# Altium PCB AC_board.PcbDoc (part 2 of 4)
Units mil, origin at the board's own origin, x right, y up, seen from the top; angles counter-clockwise.
Board outline 6299.21 x 4130.86 mil, 4 copper layers (Top Layer, Layer 1, Layer 2, Bottom Layer), stack 31.891 mil thick; 48 components, 40 nets, 187 pads, 6431 vias.
Unrouted connection lines stored in the file: 10.
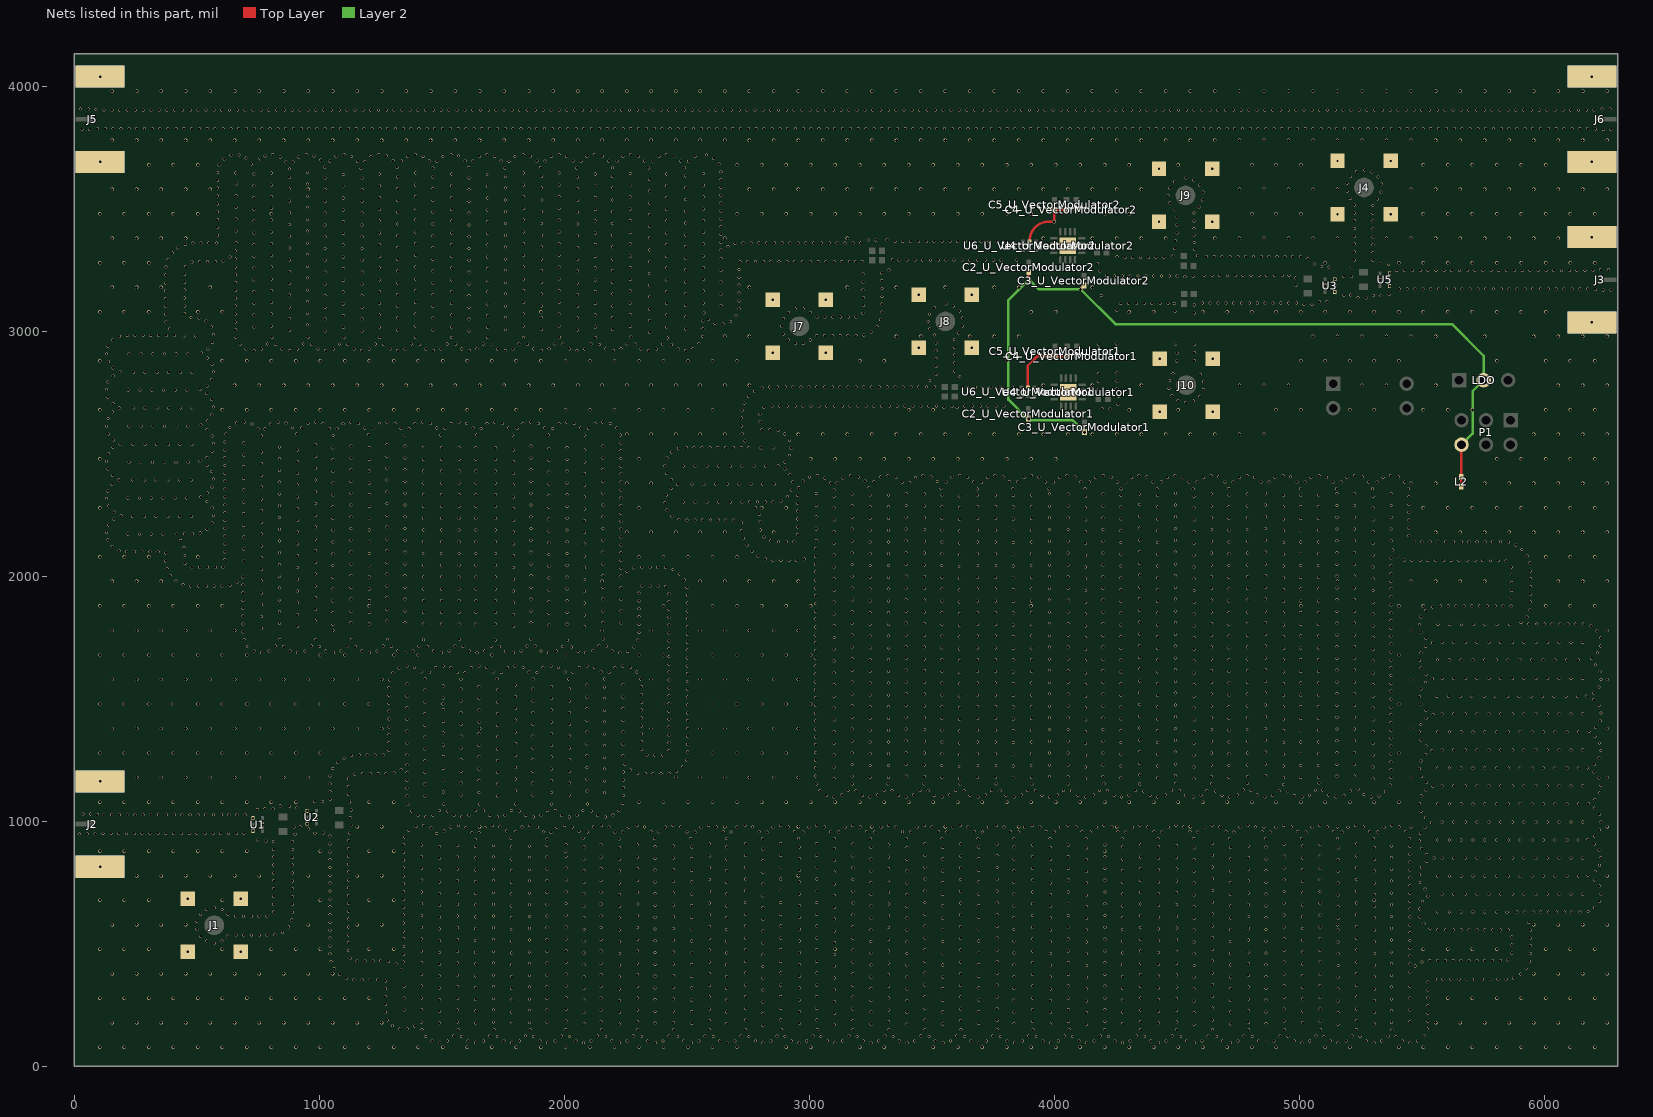
[diagram p4: the nets of this part, all layers, seen from the top]

## Via types
v1: diameter 12/12/12/12 (per signal layer), hole 10, Top Layer to Bottom Layer, 5510 vias
v2: diameter 14/14/14/14 (per signal layer), hole 12, Top Layer to Bottom Layer, 919 vias
v3: diameter 15/15/15/15 (per signal layer), hole 12, Top Layer to Bottom Layer, 2 vias

## Nets (pads, with @x,y where several pads share a name; then routed paths per layer and width w, separated by ;. In a path a pad name is that pad's centre, name@x,y a point inside that pad or via, vN(x,y) a via of type N, cw(c..) or ccw(c..) an arc to the next point about the centre after c; other vN are vias at no path point) (continued)
AGND: (continued)
  other v1: 1492.18,98.86 1638.79,98.86 1785.4,98.86 1932.01,98.86 2078.62,98.86 2225.23,98.86 2371.84,98.86 2518.45,98.86 2665.06,98.86 2811.67,98.86 2958.28,98.86 3104.89,98.86 3251.5,98.86 3398.11,98.86 3544.71,98.86 3691.33,98.86 3837.93,98.86 3984.56,98.86 4131.14,98.86 4277.79,98.86 4424.35,98.86 4571.03,98.86 4717.53,98.86 4864.3,98.86 5010.68,98.86 5157.63,98.86 5303.75,98.86 5451.07,98.86 1460.86,105.44 1607.47,105.44 1754.08,105.44 1900.69,105.44 2047.3,105.44 2193.91,105.44 2340.52,105.44 2487.13,105.44 2633.74,105.44 2780.35,105.44 2926.96,105.44 3073.57,105.44 3220.18,105.44 3366.79,105.44 3513.4,105.44 3660.01,105.43 3806.61,105.44 3953.24,105.43 4099.83,105.44 4246.47,105.43 4393.03,105.45 4539.71,105.42 4686.22,105.46 4832.98,105.4 4979.37,105.49 5126.3,105.36 5419.72,105.28 1523.35,106.09 1669.96,106.09 1816.57,106.09 1963.18,106.09 2109.79,106.09 2256.4,106.09 2403.01,106.09 2549.62,106.09 2696.23,106.09 2842.84,106.09 2989.45,106.09 3136.06,106.09 3282.67,106.09 3429.28,106.09 3575.89,106.09 3722.5,106.09 3869.1,106.09 4015.73,106.1 4162.32,106.09 4308.96,106.1 4455.52,106.08 4602.2,106.11 4748.71,106.07 4895.47,106.13 5041.86,106.04 5188.78,106.17 5272.45,105.55 5334.94,105.98 5482.2,106.25 1435.05,124.36 1581.66,124.36 1728.27,124.36 1874.88,124.36 2021.49,124.36 2168.1,124.36 2314.71,124.36 2461.32,124.36 2607.93,124.36 2754.55,124.36 2901.15,124.36 3047.77,124.36 3194.37,124.36 3340.99,124.36 3487.59,124.36 3634.21,124.36 3780.81,124.37 3927.43,124.35 4074.03,124.37 4220.66,124.34 4367.23,124.38 4513.89,124.32 4660.43,124.41 4807.14,124.28 4953.61,124.47 5100.43,124.2 5393.78,124.02 5246.74,124.59 5360.31,125.49 1548.62,125.72 1695.23,125.72 1841.84,125.72 1988.45,125.72 2135.06,125.72 2281.67,125.72 2428.28,125.72 2574.89,125.72 2721.5,125.72 2868.11,125.72 3014.72,125.72 3161.33,125.72 3307.94,125.72 3454.55,125.72 3601.16,125.72 3747.77,125.73 3894.38,125.72 4041,125.73 4187.59,125.71 4334.22,125.74 4480.8,125.7 4627.46,125.76 4774,125.67 4920.71,125.8 5067.18,125.61 5213.99,125.88 5507.34,126.05 1419.66,152.41 1566.27,152.41 1712.88,152.41 1859.49,152.41 2006.1,152.41 2152.71,152.41 2299.32,152.41 2445.93,152.41 2592.54,152.41 2739.15,152.41 2885.76,152.41 3032.37,152.41 3178.98,152.42 3325.59,152.41 3472.2,152.42 3618.81,152.41 3765.42,152.42 3912.03,152.4 4058.64,152.43 4205.26,152.39 4351.85,152.45 4498.48,152.37 4645.06,152.48 4791.72,152.32 5084.97,152.21 5378.24,151.99 4938.26,152.55 5231.44,152.7 1328.26,154.4 1360.26,154.16 5522,154.5 1299.35,168.12 1389.33,167.55 2811.31,170 3102.31,171 4130.31,174 4569.31,174 5156.31,174 2225.31,175 3399.31,175 3983.31,175 5305.31,175 3252,176 3544.31,176 4719.31,176 1785.31,177 2080.31,177 2662.31,177 3835.31,177 4278.31,177 4863.31,177 2520.31,178 2959.31,178 3691.31,178 1490.31,179 2370.31,179 4424.31,179 1638.31,180 2445.31,181 5012.31,181 1858.31,182 4791.31,182 5375.31,182 4497.31,183 1416.61,184.27 1564.31,184 1711.31,184 1930.31,184 2149.31,185 2298.31,185 3322.31,185 4351.31,185 5451.07,184.73 3911.31,186 4056.31,186 4206.31,186 5524.49,186.4 2006.31,187 4936.31,188 5084.31,188 2592.31,189 3178.31,189 3617.31,189 5233.31,189 3765.31,190 2740.31,191 2883.31,191 3030.31,191 3472.31,191 1278.59,192.47 4644.31,192 2811.31,218 5524.49,218.4 3102.31,219 4130.31,222 4569.31,222 5156.31,222 1270.03,223.3 2225.31,223 3399.31,223 3983.31,223 5305.31,223 3252,224 3544.31,224 4719.31,224 1785.31,225 2080.31,225 2662.31,225 3835.31,225 4278.31,225 4863.31,225 2520.31,226 2959.31,226 3691.31,226 1490.31,227 2370.31,227 4424.31,227 1638.31,228 2445.31,229 5012.31,229 1858.31,230 4791.31,230 5375.31,230 4497.31,231 1564.31,232 1711.31,232 1930.31,232 1345.31,233 2149.31,233 2298.31,233 3322.31,233 4351.31,233 5451.07,232.73 1417.31,234 3911.31,234 4056.31,234 4206.31,234 2006.31,235 4936.31,236 5084.31,236 2592.31,237 3178.31,237 3617.31,237 5233.31,237 3765.31,238 2740.31,239 2883.31,239 3030.31,239 3472.31,239 4644.31,240 5524.49,250.4 1270,255.3 2811.31,266 3102.31,267 4130.31,270 4569.31,270 5156.31,270 2225.31,271 3399.31,271 3983.31,271 5305.31,271 3252,272 3544.31,272 4719.31,272 1785.31,273 2080.31,273 2662.31,273 3835.31,273 4278.31,273 4863.31,273 2520.31,274 2959.31,274 3691.31,274 1490.31,275 2370.31,275 4424.31,275 1638.31,276 2445.31,277 5012.31,277 1858.31,278 4791.31,278 5375.31,278 4497.31,279 1564.31,280 1711.31,280 1930.31,280 1345.31,281 2149.31,281 2298.31,281 3322.31,281 4351.31,281 5451.07,280.73 1417.31,282 3911.31,282 4056.31,282 4206.31,282 5524.49,282.4 2006.31,283 4936.31,284 5084.31,284 2592.31,285 3178.31,285 3617.31,285 5233.31,285 3765.31,286 1270,287.3 2740.31,287 2883.31,287 3030.31,287 3472.31,287 4644.31,288 2811.31,314 5524.49,314.4 3102.31,315 4130.31,318 4569.31,318 5156.31,318 1270,319.3 2225.31,319 3399.31,319 3983.31,319 5305.31,319 3252,320 3544.31,320 4719.31,320 1785.31,321 2080.31,321 2662.31,321 3835.31,321 4278.31,321 4863.31,321 2520.31,322 2959.31,322 3691.31,322 1490.31,323 2370.31,323 4424.31,323 1638.31,324 2445.31,325 5012.31,325 1858.31,326 4791.31,326 5375.31,326 4497.31,327 1564.31,328 1711.31,328 1930.31,328 1345.31,329 2149.31,329 2298.31,329 3322.31,329 4351.31,329 5451.07,328.73 1417.31,330 3911.31,330 4056.31,330 4206.31,330 2006.31,331 4936.31,332 5084.31,332 2592.31,333 3178.31,333 3617.31,333 5233.31,333 3765.31,334 2740.31,335 2883.31,335 3030.31,335 3472.31,335 4644.31,336 5524.49,346.4 1270,351.3 1142.34,355.95 1174.34,355.95 1206.34,355.95 1238.34,355.95 5554.33,357.95 5586.33,357.95 5618.33,357.95 5650.33,357.95 5682.33,357.95 5714.33,357.95 5746.33,357.95 5778.33,357.95 5810.33,357.95 5842.33,357.9 1110.8,361.36 2811.31,362 3102.31,363 5873.76,363.94 4130.31,366 4569.31,366 5156.31,366 2225.31,367 3399.31,367 3983.31,367 5305.31,367 3252,368 3544.31,368 4719.31,368 1785.31,369 2080.31,369 2662.31,369 3835.31,369 4278.31,369 4863.31,369 2520.31,370 2959.31,370 3691.31,370 1490.31,371 2370.31,371 4424.31,371 1638.31,372 2445.31,373 5012.31,373 1858.31,374 4791.31,374 5375.31,374 4497.31,375 1564.31,376 1711.31,376 1930.31,376 1083.17,377.49 2149.31,377 2298.31,377 3322.31,377 4351.31,377 1417.31,378 3911.31,378 4056.31,378 4206.31,378 2006.31,379 5901.82,379.31 4936.31,380 5084.31,380 2592.31,381 3178.31,381 3617.31,381 5233.31,381 3765.31,382 2740.31,383 2883.31,383 3030.31,383 3472.31,383 4644.31,384 5451.18,388 1334.95,396.62 1061.52,401.06 5923.93,402.45 2811.31,410 3102.31,411 5472.23,412.1 4130.31,414 4569.31,414 5156.31,414 2225.31,415 3399.31,415 3983.31,415 5305.31,415 3252,416 3544.31,416 4719.31,416 1785.31,417 2080.31,417 2662.31,417 3835.31,417 4278.31,417 4863.31,417 2520.31,418 2959.31,418 3691.31,418 1490.31,419 2370.31,419 4424.31,419 1312.72,419.64 1638.31,420 5451.18,420 2445.31,421 5012.31,421 1858.31,422 4791.31,422 5375.31,422 4497.31,423 1564.31,424 1711.31,424 1930.31,424 2149.31,425 2298.31,425 3322.31,425 4351.31,425 1417.31,426 3911.31,426 4056.31,426 4206.31,426 2006.31,427 1343.31,427.52 4936.31,428 5084.31,428 5499.77,428.41 2592.31,429 3178.31,429 3617.31,429 5233.31,429 1048.26,430.19 3765.31,430 1282.83,431.06 2740.31,431 2883.31,431 3030.31,431 3472.31,431 5937.62,431.37 1154.84,432.05 1186.84,432.05 1218.84,432.05 1250.84,432.05 4644.31,432 5531.27,434.05 5563.27,434.05 5595.27,434.05 5627.27,434.05 5659.27,434.05 5691.27,434.05 5723.27,434.05 5755.27,434.05 5787.27,434.05 5819.27,434.05 5851.12,437.18 1124.98,443.55 5451.18,452 2811.31,458 3102.31,459 1343.31,459.52 1044.24,461.93 4130.31,462 4569.31,462 5156.31,462 2225.31,463 3399.31,463 3983.31,463 5305.31,463 5942.05,463.06 3252,464 3544.31,464 4719.31,464 1785.31,465 2080.31,465 2662.31,465 3835.31,465 4278.31,465 4863.31,465 2520.31,466 2959.31,466 3691.31,466 5865.95,465.53 1490.31,467 2370.31,467 4424.31,467 1638.31,468 2445.31,469 5012.31,469 463.73,469.73 680.27,469.73 1858.31,470 4791.31,470 5375.31,470 4497.31,471 1564.31,472 1711.31,472 1930.31,472 2149.31,473 2298.31,473 3322.31,473 4351.31,473 1417.31,474 3911.31,474 4056.31,474 4206.31,474 1120.34,475.21 2006.31,475 4936.31,476 5084.31,476 2592.31,477 3178.31,477 3617.31,477 5233.31,477 3765.31,478 2740.31,479 2883.31,479 3030.31,479 3472.31,479 4644.31,480 5451.18,484 1343.31,491.52 1044.24,493.93 5942.05,495.06 5865.95,497.53 572.48,506.3 2811.31,506 1120.34,507.21 3102.31,507 4130.31,510 4569.31,510 5156.31,510 2225.31,511 3399.31,511 3983.31,511 5305.31,511 3252,512 3544.31,512 4719.31,512 541.24,513.22 1785.31,513 2080.31,513 2662.31,513 3835.31,513 4278.31,513 4863.31,513 603.64,513.58 2520.31,514 2959.31,514 3691.31,514 1490.31,515 2370.31,515 4424.31,515 1638.31,516 5451.18,516 2445.31,517 5012.31,517 1858.31,518 4791.31,518 5375.31,518 4497.31,519 1564.31,520 1711.31,520 1930.31,520 2149.31,521 2298.31,521 3322.31,521 4351.31,521 1417.31,522 3911.31,522 4056.31,522 4206.31,522 2006.31,523 1343.31,523.52 4936.31,524 5084.31,524 2592.31,525 3178.31,525 3617.31,525 5233.31,525 1044.24,525.93 3765.31,526 2740.31,527 2883.31,527 3030.31,527 3472.31,527 5942.05,527.06 4644.31,528 5865.95,529.53 516.17,533.11 628.4,533.85 659.99,538.95 691.99,538.95 723.99,538.95 755.99,538.95 787.99,538.95 1120.34,539.21 819.99,539.58 5451.18,548 850.45,549.39 2811.31,554 3102.31,555 1343.31,555.52 1044.24,557.93 4130.31,558 4569.31,558 5156.31,558 5563.84,558.02 5595.84,558.26 5627.84,558.26 5659.84,558.26 5691.84,558.26 5723.84,558.26 5755.84,558.26 5787.84,558.26 5819.84,558.26 5851.84,558.26 2225.31,559 3399.31,559 3983.31,559 5305.31,559 5942.22,559.06 3252,560 3544.31,560 4719.31,560 1785.31,561 2080.31,561 2662.31,561 3835.31,561 4278.31,561 4863.31,561 502.1,561.84 2520.31,562 2959.31,562 3691.31,562 1490.31,563 2370.31,563 4424.31,563 1638.31,564 2445.31,565 5012.31,565 5532.65,565.18 1858.31,566 4791.31,566 5375.31,566 4497.31,567 1564.31,568 1711.31,568 1930.31,568 2149.31,569 2298.31,569 3322.31,569 4351.31,569 1417.31,570 3911.31,570 4056.31,570 4206.31,570 874.38,570.63 1120.34,571.21 2006.31,571 4936.31,572 5084.31,572 2592.31,573 3178.31,573 3617.31,573 5233.31,573 3765.31,574 2740.31,575 2883.31,575 3030.31,575 3472.31,575 4644.31,576 5451.18,580 5507.1,584.45 1343.31,587.52 1044.24,589.93 5935.36,590.32 502.01,593.84 888.28,599.46 2811.31,602 1120.34,603.21 3102.31,603 4130.31,606 4569.31,606 5156.31,606 2225.31,607 3399.31,607 3983.31,607 5305.31,607 3252,608 3544.31,608 4719.31,608 1785.31,609 2080.31,609 2662.31,609 3835.31,609 4278.31,609 4863.31,609 2520.31,610 2959.31,610 3691.31,610 1490.31,611 2370.31,611 4424.31,611 1638.31,612 5451.18,612 2445.31,613 5012.31,613 5492,612.66 1858.31,614 4791.31,614 5375.31,614 659.35,615.05 691.35,615.05 723.35,615.05 755.35,615.05 787.35,615.05 4497.31,615 1564.31,616 1711.31,616 1930.31,616 2149.31,617 2298.31,617 3322.31,617 4351.31,617 1417.31,618 3911.31,618 4056.31,618 4206.31,618 2006.31,619 1343.31,619.52 4936.31,620 5084.31,620 2592.31,621 3178.31,621 3617.31,621 5233.31,621 628.21,622.4 1044.24,621.93 3765.31,622 515.97,622.64 2740.31,623 2883.31,623 3030.31,623 3472.31,623 4644.31,624 890.56,631.38 5846.62,631.26 814.46,632.06 5888.35,631.56 5920.35,631.56 5952.35,631.56 5984.35,631.56 6016.35,631.56 6048.35,631.56 6080.35,631.56 6112.35,631.56 6144.35,631.56 5563.88,632.96 5611.88,632.96 5659.88,632.96 5707.88,632.96 5755.88,632.96 5803.88,632.96 6176.22,634.47 1120.34,635.21 540.94,642.66 603.34,642.54 5451.18,644 5490.19,644.61 572.15,649.7 2811.31,650 6204.37,649.68 3102.31,651 1343.31,651.52 1044.24,653.93 4130.31,654 4569.31,654 5156.31,654 2225.31,655 3399.31,655 3983.31,655 5305.31,655 3252,656 3544.31,656 4719.31,656 1785.31,657 2080.31,657 2662.31,657 3835.31,657 4278.31,657 4863.31,657 2520.31,658 2959.31,658 3691.31,658 1490.31,659 2370.31,659 4424.31,659 1638.31,660 2445.31,661 5012.31,661 1858.31,662 4791.31,662 5375.31,662 890.56,663.38 4497.31,663 814.46,664.06 1564.31,664 1711.31,664 1930.31,664 2149.31,665 2298.31,665 3322.31,665 4351.31,665 1417.31,666 3911.31,666 4056.31,666 4206.31,666 1120.34,667.21 2006.31,667 4936.31,668 5084.31,668 2592.31,669 3178.31,669 3617.31,669 5233.31,669 3765.31,670 2740.31,671 2883.31,671 3030.31,671 3472.31,671 4644.31,672 5501.72,674.46 6223.52,675.32 5451.18,676 1343.31,683.52 463.73,686.27 680.27,686.27 1044.24,685.93 890.56,695.38 814.46,696.06 5524.8,696.63 2811.31,698 1120.34,699.21 3102.31,699 4130.31,702 4569.31,702 5156.31,702 2225.31,703 3399.31,703 3983.31,703 5305.31,703 3252,704 3544.31,704 4719.31,704 1785.31,705 2080.31,705 2662.31,705 3835.31,705 4278.31,705 4863.31,705 2520.31,706 2959.31,706 3691.31,706 5580.62,706.26 5628.62,706.26 5676.62,706.26 5724.62,706.26 5772.62,706.26 5820.62,706.26 5868.62,706.26 5916.62,706.26 5964.62,706.26 6011.62,706.26 6059.62,706.26 6107.62,706.26 6155.62,706.26 1490.31,707 2370.31,707 4424.31,707 6230.3,706.59 1638.31,708 5451.18,708 2445.31,709 5012.31,709 1858.31,710 4791.31,710 5375.31,710 4497.31,711 1564.31,712 1711.31,712 1930.31,712 2149.31,713 2298.31,713 3322.31,713 4351.31,713 1417.31,714 3911.31,714 4056.31,714 4206.31,714 2006.31,715 1343.31,715.52 4936.31,716 5084.31,716 2592.31,717 3178.31,717 3617.31,717 5233.31,717 1044.24,717.93 3765.31,718 2740.31,719 2883.31,719 3030.31,719 3472.31,719 4644.31,720 5511.91,725.92 890.56,727.38 814.46,728.06 1120.34,731.21 6223.27,737.81 5451.18,740 2811.31,746 3102.31,747 1343.31,747.52 1044.24,749.93 4130.31,750 4569.31,750 5156.31,750 2225.31,751 3399.31,751 3983.31,751 5305.31,751 3252,752 3544.31,752 4719.31,752 1785.31,753 2080.31,753 2662.31,753 3835.31,753 4278.31,753 4863.31,753 5494.31,752.64 2520.31,754 2959.31,754 3691.31,754 1490.31,755 2370.31,755 4424.31,755 1638.31,756 2445.31,757 5012.31,757 1858.31,758 4791.31,758 5375.31,758 890.56,759.38 4497.31,759 814.46,760.06 1564.31,760 1711.31,760 1930.31,760 2149.31,761 2298.31,761 3322.31,761 4351.31,761 1417.31,762 3911.31,762 4056.31,762 4206.31,762 1120.34,763.21 2006.31,763 6203.85,763.25 4936.31,764 5084.31,764 2592.31,765 3178.31,765 3617.31,765 5233.31,765 3765.31,766 2740.31,767 2883.31,767 3030.31,767 3472.31,767 4644.31,768 5451.18,772 1343.31,779.52 5563.88,779.57 5611.88,779.57 5659.88,779.57 5707.88,779.57 5755.88,779.57 5803.88,779.57 5851.88,779.57 5899.88,779.57 5947.88,779.57 5994.88,779.57 6042.88,779.57 6090.88,779.57 6138.88,779.57 6177.52,781.43 1044.24,781.93 5489.28,784.24 890.56,791.38 814.46,792.06 2811.31,794 1120.34,795.21 3102.31,795 6205.42,797.09 4130.31,798 4569.31,798 5156.31,798 2225.31,799 3399.31,799 3983.31,799 5305.31,799 3252,800 3544.31,800 4719.31,800 1785.31,801 2080.31,801 2662.31,801 3835.31,801 4278.31,801 4863.31,801 2520.31,802 2959.31,802 3691.31,802 1490.31,803 2370.31,803 4424.31,803 1638.31,804 5451.18,804 2445.31,805 5012.31,805 1858.31,806 4791.31,806 5375.31,806 4497.31,807 1564.31,808 1711.31,808 1930.31,808 2149.31,809 2298.31,809 3322.31,809 4351.31,809 1417.31,810 3911.31,810 4056.31,810 4206.31,810 2006.31,811 1343.31,811.52 4936.31,812 5084.31,812 2592.31,813 3178.31,813 3617.31,813 5233.31,813 1044.24,813.93 3765.31,814 2740.31,815 2883.31,815 3030.31,815 3472.31,815 5498.1,815 4644.31,816 106,817 890.56,823.38 6224.02,823.14 814.46,824.06 1120.34,827.21 5451.18,836 5519.07,839.18 2811.31,842 3102.31,843 1343.31,843.52 1044.24,845.93 4130.31,846 4569.31,846 5156.31,846 2225.31,847 3399.31,847 3983.31,847 5305.31,847 3252,848 3544.31,848 4719.31,848 1785.31,849 2080.31,849 2662.31,849 3835.31,849 4278.31,849 4863.31,849 2520.31,850 2959.31,850 3691.31,850 1490.31,851 2370.31,851 4424.31,851 1638.31,852 2445.31,853 5012.31,853 5548.09,852.65 5580.62,852.87 5628.62,852.87 5676.62,852.87 5724.62,852.87 5772.62,852.87 5820.62,852.87 5868.62,852.87 5916.62,852.87 5964.62,852.87 6011.62,852.87 6059.62,852.87 6107.62,852.87 6155.62,852.87 1858.31,854 4791.31,854 5375.31,854 890.56,855.38 4497.31,855 6230.3,854.52 814.46,856.06 1564.31,856 1711.31,856 1930.31,856 2149.31,857 2298.31,857 3322.31,857 4351.31,857 1417.31,858 3911.31,858 4056.31,858 4206.31,858 1120.34,859.21 2006.31,859 4936.31,860 5084.31,860 2592.31,861 3178.31,861 3617.31,861 5233.31,861 3765.31,862 2740.31,863 2883.31,863 3030.31,863 3472.31,863 4644.31,864 5519.22,866.45 5451.18,868 1343.31,875.52 1044.24,877.93 6222.77,885.62 890.56,887.38 814.46,888.06 2811.31,890 1120.34,891.21 3102.31,891 5498.2,890.58 4130.31,894 4569.31,894 5156.31,894 2225.31,895 3399.31,895 3983.31,895 5305.31,895 3252,896 3544.31,896 4719.31,896 1785.31,897 2080.31,897 2662.31,897 3835.31,897 4278.31,897 4863.31,897 2520.31,898 2959.31,898 3691.31,898 1490.31,899 2370.31,899 4424.31,899 1638.31,900 5451.18,900 2445.31,901 5012.31,901 1858.31,902 4791.31,902 5375.31,902 4497.31,903 1564.31,904 1711.31,904 1930.31,904 2149.31,905 2298.31,905 3322.31,905 4351.31,905 1417.31,906 3911.31,906 4056.31,906 4206.31,906 2006.31,907 1343.31,907.52 4936.31,908 5084.31,908 2592.31,909 3178.31,909 3617.31,909 5233.31,909 1044.24,909.93 3765.31,910 2740.31,911 2883.31,911 3030.31,911 3472.31,911 6202.83,910.64 4644.31,912 890.56,919.38 814.46,920.06 5489.3,921.31 782.55,922.42 1120.34,923.21 750.78,926.25 5563.88,926.18 5611.88,926.18 5659.88,926.18 5707.88,926.18 5755.88,926.18 5803.88,926.18 5851.88,926.18 5899.88,926.18 5947.88,926.18 5994.88,926.18 6042.88,926.18 6090.88,926.18 6138.88,926.18 1637.51,927.25 6175.65,927.54 1930.02,929.88 2222.97,930.91 2516.05,931.4 2662.46,932.18 2809.21,931.64 2955.72,932.01 3102.4,931.75 3248.96,931.93 3395.61,931.81 3542.19,931.89 3688.82,931.83 3835.42,931.88 3982.04,931.85 4128.64,931.87 4275.25,931.85 4421.86,931.86 4568.47,931.86 4715.08,931.86 4861.69,931.86 5008.3,931.86 5154.91,931.86 5301.52,931.86 5448.13,931.86 2075.72,933.28 2369.14,932.53 1781.84,935.13 1349,939 1044.24,941.93 6203.91,942.54 901.5,949.45 22.17,949.73 54.17,949.73 86.16,950.41 118.06,952.95 150.06,952.95 182.06,952.95 214.06,952.95 246.06,952.95 278.06,952.95 310.06,952.95 342.06,952.95 374.06,952.95 406.06,952.95 438.06,952.95 470.06,952.95 502.06,952.95 534.06,952.95 566.06,952.95 598.06,952.95 630.06,952.95 662.06,952.95 694.06,952.95 1479.93,952.53 5494.24,952.93 982.99,953.72 1014.97,954.87 1124.41,954.95 1623.77,956.15 1651.85,955.85 1946.29,957.43 1915.33,958.3 2239.96,958.03 2533.39,958.3 2826.71,958.43 3119.98,958.49 2094.33,959.31 2207.91,959.15 2387.25,958.91 2680.33,958.72 2973.48,958.63 3266.66,958.59 3413.22,958.52 3559.87,958.57 3706.45,958.54 3853.08,958.56 3999.68,958.54 4146.3,958.55 4292.9,958.55 4439.52,958.55 4586.12,958.55 4732.73,958.55 4879.34,958.55 5025.95,958.55 5172.56,958.55 5319.17,958.55 1801.77,960.17 2353.51,960.45 2500.82,959.54 2646.95,960.17 2793.9,959.74 2940.27,960.04 3087.04,959.83 3233.54,959.97 3380.23,959.87 3526.79,959.94 3673.43,959.89 3820.02,959.93 3966.65,959.9 4113.24,959.92 4259.86,959.91 4406.47,959.92 4553.08,959.91 4699.69,959.91 4846.3,959.91 4992.91,959.91 5139.52,959.91 5286.13,959.91 5432.74,959.91 2059.78,961.02 1510.45,962.17 1765.14,962.43 730.02,963.02 1367.08,965.41 6223.3,968.01 955.73,970.47 1456.76,974.59 1599.4,976.89 1676.13,976.7 1890.16,978.06 1971.1,977.64 2182.4,978.47 2265.02,977.93 2412.67,978.36 2558.56,978.06 2705.67,978.26 2851.93,978.12 2998.78,978.22 3145.23,978.15 3291.95,978.2 3438.48,978.17 3585.15,978.19 3731.72,978.17 3878.36,978.19 4024.95,978.18 4171.57,978.18 4318.17,978.18 4464.79,978.18 4611.39,978.18 4758.01,978.18 4904.61,978.18 5051.22,978.18 5197.83,978.18 5344.44,978.18 1827.68,978.96 2033.57,979.39 2119.9,978.55 2327.5,979.09 2475.16,978.66 2621.05,978.96 2768.16,978.75 2914.42,978.89 3061.27,978.8 3207.72,978.86 3354.44,978.82 3500.97,978.85 3647.64,978.83 3794.21,978.84 3940.84,978.83 4087.44,978.84 4234.06,978.83 4380.66,978.84 4527.28,978.83 4673.88,978.84 4820.49,978.84 4967.1,978.84 5113.71,978.84 5260.32,978.84 5406.93,978.84 897,980 1537.01,980.01 1738.5,980.15 5511.78,979.69 921,981 1394.59,981.75 1426.44,984.84 1568.55,985.41 1706.93,985.38 1859.02,985.41 2002.14,985.41 2151.16,985.41 2296.13,985.41 2443.88,985.41 2589.7,985.41 2736.86,985.41 2883.09,985.41 3029.96,985.41 3176.39,985.41 3323.13,985.41 3469.65,985.41 3616.32,985.41 3762.89,985.41 3909.53,985.41 4056.12,985.41 4202.74,985.41 4349.34,985.41 4495.96,985.41 4642.56,985.41 4789.18,985.41 4935.79,985.41 5082.4,985.41 5229.01,985.41 5375.62,985.41 1130.98,986.27 769,989 950.8,993.02 5538.97,996.58 5580.62,999.48 5628.62,999.48 5676.62,999.48 5724.62,999.48 5772.62,999.48 5820.62,999.48 5868.62,999.48 5916.62,999.48 5964.62,999.48 6011.62,999.48 6059.62,999.48 6107.62,999.48 6155.62,999.48 6230.3,999.23 730.02,1014.98 1126.88,1017.31 5514.23,1016.88 989.78,1019 1434.21,1019.74 1581.04,1019.78 1727.34,1019.82 1874.39,1019.87 2020.36,1019.91 2167.9,1019.95 1402.9,1026.34 1549.71,1026.3 1696.04,1026.46 1843.05,1026.34 2136.54,1026.31 1465.39,1026.94 1612.2,1027.07 1758.53,1027 1905.54,1027.21 1989.08,1026.62 2051.57,1027.01 2199.02,1027.4 121.02,1029.05 153.02,1029.05 185.02,1029.05 217.02,1029.05 249.02,1029.05 281.02,1029.05 313.02,1029.05 345.02,1029.05 377.02,1029.05 409.02,1029.05 441.02,1029.05 473.02,1029.05 505.02,1029.05 537.02,1029.05 569.02,1029.05 601.02,1029.05 633.02,1029.05 665.02,1029.05 697.02,1029.05 95,1030 6223.49,1030.5 35.89,1032.27 67.89,1032.27 5495.55,1042.86 950.8,1044.98 1377.12,1045.29 1523.86,1045.16 1670.28,1045.45 1817.16,1045.14 2110.56,1045 1963.38,1045.69 2076.95,1046.5 1490.68,1046.55 1637.42,1046.76 1783.85,1046.56 1930.72,1046.95 2224.11,1047.26 1130.98,1049.04 747.45,1050.37 779.26,1053.83 811.26,1053.56 6204.31,1056.12 909.77,1057.58 878.32,1063.51 841.3,1064.57 1361.75,1073.36 1508.41,1073.19 1801.67,1073.14 2094.97,1072.94 5563.88,1072.79 5611.88,1072.79 5659.88,1072.79 5707.88,1072.79 5755.88,1072.79 5803.88,1072.79 5851.88,1072.79 5899.88,1072.79 5947.88,1072.79 5994.88,1072.79 6042.88,1072.79 6090.88,1072.79 6138.88,1072.79 1654.94,1073.54 1948.11,1073.82 5489.2,1074.23 6178.39,1074.88 2238.72,1075.73 1123.55,1080.17 1013.2,1083.13 981.21,1084.05 6206.07,1090.94 1044.02,1091.72 3101.1,1101.72 3247.77,1101.72 3394.3,1101.72 3541.02,1101.72 3687.47,1101.72 3834.31,1101.72 3980.59,1101.72 4127.68,1101.72 4273.6,1101.72 4421.21,1101.72 4566.38,1101.72 4715.1,1101.72 4858.65,1101.72 5009.97,1101.72 5149.57,1101.72 5292.65,1102.07 1358.71,1105.21 5496.65,1105.35 1432.31,1106 1728.31,1106 5324.41,1106.03 4978.44,1107.17 5181.07,1107.39 2241.17,1107.64 3069.79,1108.3 3216.45,1108.28 3362.99,1108.31 3509.7,1108.27 3656.16,1108.33 3802.98,1108.24 3949.29,1108.37 4096.34,1108.18 4242.31,1108.45 4389.84,1108.07 4683.68,1107.81 4889.98,1108.27 3132.28,1108.94 3278.94,1108.96 3425.48,1108.93 3572.19,1108.97 3718.65,1108.91 3865.47,1109 4011.78,1108.87 4158.83,1109.05 4304.81,1108.79 4452.33,1109.17 4535.13,1108.62 4597.62,1108.63 4746.16,1109.42 4827.49,1108.97 1578.31,1110 1873.31,1110 2021.31,1110 5040.83,1110.16 5118.63,1109.89 1120.12,1111.98 5262.13,1111.69 6224.36,1117.19 2164.31,1119 1652.31,1120 1947.31,1120 1506.31,1122 5351.57,1122.94 1044.02,1123.72 4951.91,1125.07 5207.48,1125.46 2093.31,1126 4657.52,1126.24 1800.31,1127 3043.99,1127.23 3190.63,1127.19 3337.2,1127.25 3483.87,1127.16 3630.39,1127.29 3777.14,1127.11 3923.54,1127.37 4070.45,1126.99 4363.86,1126.74 4915.8,1127.16 4037.11,1128.43 4216.63,1127.54 4330.2,1128.26 4509.59,1127.89 4623.16,1127.91 3157.56,1128.56 3304.2,1128.6 3450.76,1128.54 3597.44,1128.63 3743.95,1128.51 3890.7,1128.68 4184.01,1128.8 4477.41,1129.04 4802.24,1128.63 4771.03,1129.56 5094.09,1130.42 5516.51,1130.44 5065.25,1130.86 5238.51,1133.27 1358.71,1137.21 2241.17,1139.64 1120.12,1143.98 5544.98,1145.04 5580.62,1146.09 5628.62,1146.09 5676.62,1146.09 5724.62,1146.09 5772.62,1146.09 5820.62,1146.09 5868.62,1146.09 5916.62,1146.09 5964.62,1146.09 6011.62,1146.09 6059.62,1146.09 6107.62,1146.09 6155.62,1146.09 6230.3,1148.64 5369.08,1149.73 4935.39,1152.47 1432.31,1154 1728.31,1154 4641.65,1154.02 3028.6,1155.29 3175.23,1155.24 3321.82,1155.31 3468.46,1155.21 3615.03,1155.36 3761.7,1155.14 3908.22,1155.46 4054.96,1154.99 4348.26,1154.68 1044.02,1155.72 4201.38,1155.67 4494.49,1156.1 4787.46,1157.01 1578.31,1158 1873.31,1158 2021.31,1158 5080.1,1159.2 5517.32,1161.12 106,1165 2164.31,1167 1652.31,1168 1947.31,1168 1358.71,1169.21 1506.31,1170 2241.17,1171.64 2093.31,1174 1800.31,1175 1120.12,1175.98 3100.26,1176.4 4126,1176 4569,1176 5299,1176 3613,1178 3832,1180 4272,1180 4421,1180 4934,1180 6222.43,1179.66 5374.12,1181.33 3247,1182 3323,1182 3542,1182 3686,1182 3759,1182 3907,1182 4713,1182 5005,1182 5078,1182 3469,1185 3980,1185 4055,1185 4199,1185 4640,1185 4788,1185 3173.57,1186.19 5497.04,1185.88 3025.56,1187.15 3394,1187 5153,1187 5224,1187 1044.35,1187.72 4494,1189 4861,1189 4348,1191 1145.18,1195.89 1177.17,1196.58 1209.17,1196.59 1241.17,1196.6 1273.17,1196.61 2330.74,1196.92 2362.74,1196.93 2394.74,1196.94 2426.74,1197.25 2298.77,1198.29 1305.09,1198.9 1358.71,1201.21 1432.31,1202 1728.31,1202 2241.17,1203.64 6202.14,1204.4 1578.31,1206 1873.31,1206 2021.31,1206 2457.56,1205.88 2269.45,1211.1 1333.68,1213.28 5374.12,1213.33 2164.31,1215 1652.31,1216 1947.31,1216 5489.2,1216.9 1055.41,1217.75 1506.31,1218 3025.56,1219.15 5563.88,1219.4 5611.88,1219.4 5659.88,1219.4 5707.88,1219.4 5755.88,1219.4 5803.88,1219.4 5851.88,1219.4 5899.88,1219.4 5947.88,1219.4 5994.88,1219.4 6042.88,1219.4 6090.88,1219.4 6138.88,1219.4 6174.45,1220.43 2093.31,1222 1800.31,1223 3100.26,1224.4 4126,1224 4569,1224 5299,1224 2482.81,1225.54 3613,1226 3832,1228 4272,1228 4421,1228 4934,1228 3247,1230 3323,1230 3542,1230 3686,1230 3759,1230 3907,1230 4713,1230 5005,1230 5078,1230 1358.71,1233.21 3469,1233 3980,1233 4055,1233 4199,1233 4640,1233 4788,1233 3173.57,1234.19 2248.05,1234.89 3394,1235 5153,1235 5224,1235 6202.93,1235.01 4494,1237 4861,1237 4348,1239 1075.04,1243.02 5374.12,1245.33 5495.15,1248.35 1432.31,1250 1728.31,1250 3025.56,1251.15 2498.94,1253.17 1578.31,1254 1873.31,1254 2021.31,1254 6222.82,1260.08 1101.41,1261.16 2164.31,1263 1652.31,1264 1947.31,1264 1506.31,1266 2093.31,1270 2240.31,1270 1131.76,1271.27 1800.31,1271 3100.26,1272.4 4126,1272 4569,1272 5299,1272 1163.73,1272.68 1195.73,1272.69 1227.73,1272.7 1259.73,1272.71 2337.11,1273.02 2369.11,1273.03 2401.11,1273.04 1359.31,1274 3613,1274 5513.46,1274.59 3832,1276 4272,1276 4421,1276 4934,1276 5374.12,1277.33 3247,1278 3323,1278 3542,1278 3686,1278 3759,1278 3907,1278 4713,1278 5005,1278 5078,1278 3469,1281 3980,1281 4055,1281 4199,1281 4640,1281 4788,1281 3173.57,1282.19 3025.56,1283.15 3394,1283 5153,1283 5224,1283 2503.83,1284.8 4494,1285 4861,1285 4348,1287 2427.67,1290.89 5541.15,1290.62 6230.3,1291.19 1285.41,1291.8 5580.62,1292.7 5628.62,1292.7 5676.62,1292.7 5724.62,1292.7 5772.62,1292.7 5820.62,1292.7 5868.62,1292.7 5916.62,1292.7 5964.62,1292.7 6011.62,1292.7 6059.62,1292.7 6107.62,1292.7 6155.62,1292.7 2314.47,1295.64 1432.31,1298 1728.31,1298 1578.31,1302 1873.31,1302 2021.31,1302 5374.12,1309.33 5515.21,1309.36 2164.31,1311 1652.31,1312 1947.31,1312 1506.31,1314 3025.56,1315.15 2503.77,1316.8 2093.31,1318 2240.31,1318 1800.31,1319 3100.26,1320.4 4126,1320 4569,1320 5299,1320 1359.31,1322 3613,1322 2427.67,1322.89 6223.97,1322.56 1285.41,1323.8 3832,1324 4272,1324 4421,1324 4934,1324 3247,1326 3323,1326 3542,1326 3686,1326 3759,1326 3907,1326 4713,1326 5005,1326 5078,1326 2314.47,1327.64 3469,1329 3980,1329 4055,1329 4199,1329 4640,1329 4788,1329 3173.57,1330.19 3394,1331 5153,1331 5224,1331 4494,1333 4861,1333 4348,1335 5496.02,1334.96 5374.12,1341.33 1432.31,1346 1728.31,1346 3025.56,1347.15 2503.77,1348.8 6205.32,1348.56 1578.31,1350 1873.31,1350 2021.31,1350 2427.67,1354.89 1285.41,1355.8 2164.31,1359 1652.31,1360 1947.31,1360 2314.47,1359.64 1506.31,1362 2093.31,1366 2240.31,1366 5489.2,1366.23 5563.88,1366.01 5611.88,1366.01 5659.88,1366.01 5707.88,1366.01 5755.88,1366.01 5803.88,1366.01 5851.88,1366.01 5899.88,1366.01 5947.88,1366.01 5994.88,1366.01 6042.88,1366.01 6090.88,1366.01 6138.88,1366.01 1800.31,1367 3100.26,1368.4 4126,1368 4569,1368 5299,1368 6180.67,1368.97 1359.31,1370 3613,1370 3832,1372 4272,1372 4421,1372 4934,1372 5374.12,1373.33 3247,1374 3323,1374 3542,1374 3686,1374 3759,1374 3907,1374 4713,1374 5005,1374 5078,1374 3469,1377 3980,1377 4055,1377 4199,1377 4640,1377 4788,1377 3173.57,1378.19 3025.56,1379.15 3394,1379 5153,1379 5224,1379 2503.77,1380.8 4494,1381 4861,1381 4348,1383 6207.82,1385.9 2427.67,1386.89 1285.41,1387.8 2314.47,1391.64 1432.31,1394 1728.31,1394 5496.19,1397.46 1578.31,1398 1873.31,1398 2021.31,1398 5374.12,1405.33 2164.31,1407 1652.31,1408 1947.31,1408 1506.31,1410 3025.56,1411.15 2503.77,1412.8 6225.31,1412.7 2093.31,1414 2240.31,1414 1800.31,1415 3100.26,1416.4 4126,1416 4569,1416 5299,1416 1359.31,1418 3613,1418 2427.67,1418.89 1285.41,1419.8 3832,1420 4272,1420 4421,1420 4934,1420 3247,1422 3323,1422 3542,1422 3686,1422 3759,1422 3907,1422 4713,1422 5005,1422 5078,1422 5515.56,1422.93 2314.47,1423.64 3469,1425 3980,1425 4055,1425 4199,1425 4640,1425 4788,1425 3173.57,1426.19 3394,1427 5153,1427 5224,1427 4494,1429 4861,1429 4348,1431 5374.12,1437.33 5543.81,1437.94 5580.62,1439.31 5628.62,1439.31 5676.62,1439.31 5724.62,1439.31 5772.62,1439.31 5820.62,1439.31 5868.62,1439.31 5916.62,1439.31 5964.62,1439.31 6011.62,1439.31 6059.62,1439.31 6107.62,1439.31 6155.62,1439.31 1432.31,1442 1728.31,1442 3025.56,1443.15 6230.17,1444.33 2503.77,1444.8 1578.31,1446 1873.31,1446 2021.31,1446 2427.67,1450.89 1285.41,1451.8 2164.31,1455 5516.65,1454.86 1652.31,1456 1947.31,1456 2314.47,1455.64 1506.31,1458 2093.31,1462 2240.31,1462 1800.31,1463 3100.26,1464.4 4126,1464 4569,1464 5299,1464 1359.31,1466 3613,1466 3832,1468 4272,1468 4421,1468 4934,1468 5374.12,1469.33 3247,1470 3323,1470 3542,1470 3686,1470 3759,1470 3907,1470 4713,1470 5005,1470 5078,1470 3469,1473 3980,1473 4055,1473 4199,1473 4640,1473 4788,1473 3173.57,1474.19 3025.56,1475.15 3394,1475 5153,1475 5224,1475 6221.22,1475.05 2503.77,1476.8 4494,1477 4861,1477 4348,1479 5496.72,1479.89 2427.67,1482.89 1285.41,1483.8 2314.47,1487.64 1432.31,1490 1728.31,1490 1578.31,1494 1873.31,1494 2021.31,1494 6200.15,1499.14 5374.12,1501.33 2164.31,1503 1652.31,1504 1947.31,1504 1506.31,1506 3025.56,1507.15 2503.77,1508.8 2093.31,1510 2240.31,1510 1800.31,1511 5489.2,1511 3100.26,1512.4 4126,1512 4569,1512 5299,1512 5560,1512 5608,1512 5656,1512 5704,1512 5752,1512 5800,1512 5848,1512 5896,1512 5944,1512 5991,1512 6039,1512 6087,1512 6135,1512 6171.21,1512.79 1359.31,1514 3613,1514 2427.67,1514.89 1285.41,1515.8 3832,1516 4272,1516 4421,1516 4934,1516 3247,1518 3323,1518 3542,1518 3686,1518 3759,1518 3907,1518 4713,1518 5005,1518 5078,1518 2314.47,1519.64 3469,1521 3980,1521 4055,1521 4199,1521 4640,1521 4788,1521 3173.57,1522.19 3394,1523 5153,1523 5224,1523 4494,1525 4861,1525 6200.27,1526.19 4348,1527 5374.12,1533.33 1432.31,1538 1728.31,1538 3025.56,1539.15 2503.77,1540.8 1578.31,1542 1873.31,1542 2021.31,1542 5495.49,1542.37 2427.67,1546.89 1285.41,1547.8 6221.29,1550.31 2164.31,1551 1652.31,1552 1947.31,1552 2314.47,1551.64 1506.31,1554 2093.31,1558 2240.31,1558 1800.31,1559 3100.26,1560.4 4126,1560 4569,1560 5299,1560 1359.31,1562 3613,1562 3832,1564 4272,1564 4421,1564 4934,1564 5374.12,1565.33 3247,1566 3323,1566 3542,1566 3686,1566 3759,1566 3907,1566 4713,1566 5005,1566 5078,1566 5514.09,1568.41 3469,1569 3980,1569 4055,1569 4199,1569 4640,1569 4788,1569 3173.57,1570.19 3025.56,1571.15 3394,1571 5153,1571 5224,1571 2503.77,1572.8 4494,1573 4861,1573 4348,1575 2427.67,1578.89 1287.58,1579.73 6230.19,1581.05 1578.66,1582 1871.73,1582.65 2164.88,1583.01 2311.37,1583.49 1724.77,1583.92 2018.1,1583.6 5542,1584.07 1431.32,1584.71 5580.62,1585.92 5628.62,1585.92 5676.62,1585.92 5724.62,1585.92 5772.62,1585.92 5820.62,1585.92 5868.62,1585.92 5916.62,1585.92 5964.62,1585.92 6011.62,1585.92 6059.62,1585.92 6107.62,1585.92 6155.62,1585.92 5374.12,1597.33 5515.65,1602.23 3025.56,1603.15 2503.77,1604.8 1301.79,1608.4 3100.26,1608.4 4126,1608 4569,1608 5299,1608 1595.55,1609.18 1563.65,1610.26 1742.95,1610.26 1889.01,1609.59 2036,1610.13 2182.35,1609.83 3613,1610 1450.08,1610.63 1856.52,1610.8 2149.57,1611.11 2427.67,1610.89 1415.25,1612.38 1709.09,1611.82 2002.57,1611.58 2295.91,1611.51 3832,1612 4272,1612 4421,1612 4934,1612 6225.26,1612.67 3247,1614 3323,1614 3542,1614 3686,1614 3759,1614 3907,1614 4713,1614 5005,1614 5078,1614 3469,1617 3980,1617 4055,1617 4199,1617 4640,1617 4788,1617 3173.57,1618.19 3394,1619 5153,1619 5224,1619 4494,1621 4861,1621 4348,1623 5496.23,1627.67 1326.52,1628.71 1620.56,1629.14 1914.15,1629.38 5374.12,1629.33 1475.69,1629.81 1538.18,1629.63 1683.04,1630.4 1768.38,1629.68 1830.87,1629.94 1976.64,1630.33 2061.34,1629.66 2123.83,1630.14 2207.55,1629.54 2270.04,1630.35 1388.98,1630.66 3025.56,1635.15 1357.54,1636.59 1506.96,1636.63 1651.66,1636.67 1799.6,1636.72 1945.29,1636.76 2092.54,1636.8 2238.71,1636.85 2503.77,1636.8 6207.72,1639.43 2427.67,1642.89 3100.26,1656.4 4126,1656 4569,1656 5299,1656 3613,1658 5489.2,1658.89 3832,1660 4272,1660 4421,1660 4934,1660 5563,1660 5611,1660 5659,1660 5707,1660 5755,1660 5803,1660 5851,1660 5899,1660 5947,1660 5994,1660 6042,1660 6090,1660 6138,1660 5374.12,1661.33 3247,1662 3323,1662 3542,1662 3686,1662 3759,1662 3907,1662 4713,1662 5005,1662 5078,1662 3469,1665 3980,1665 4055,1665 4199,1665 4640,1665 4788,1665 3173.57,1666.19 3025.56,1667.15 3394,1667 5153,1667 5224,1667 6191.85,1667.22 2503.77,1668.8 4494,1669 4861,1669 4348,1671 2427.67,1674.89 6215.79,1688.45 765.03,1690.01 911.85,1690.01 1058.16,1690.01 1205.2,1690.01 1351.19,1690.01 1498.7,1690.01 1644.02,1690.01 1792.51,1690.01 1936.4,1690.01 2087.12,1690.01 2227.67,1690.01 5495.97,1690.16 5374.12,1693.33 1173.86,1696.49 1467.34,1696.38 1761.1,1696.16 2055.61,1695.62 2259.13,1695.89 733.72,1696.62 796.21,1697.21 880.52,1696.54 943.01,1697.28 1026.86,1696.65 1089.35,1697.17 1236.35,1697.33 1319.91,1696.72 1382.4,1697.1 1529.82,1697.44 1612.76,1696.87 1675.26,1696.95 1905.22,1697.19 1967.71,1696.63 2194,1697 1823.58,1697.66 2118.04,1698.25 3025.56,1699.15 2503.77,1700.8 3100.26,1704.4 4126,1704 4569,1704 5299,1704 3613,1706 2427.67,1706.89 3832,1708 4272,1708 4421,1708 4934,1708 3247,1710 3323,1710 3542,1710 3686,1710 3759,1710 3907,1710 4713,1710 5005,1710 5078,1710 3469,1713 3980,1713 4055,1713 4199,1713 4640,1713 4788,1713 2029.17,1713.65 2285.42,1714.14 3173.57,1714.19 854.68,1715.41 1147.98,1715.3 1441.37,1715.08 1734.97,1714.63 3394,1715 5153,1715 5224,1715 707.94,1715.57 1001.11,1715.65 1294.21,1715.8 1587.19,1716.11 1700.76,1716.27 1993.48,1715.61 5515.11,1715.81 821.51,1716.8 968.24,1716.96 1114.68,1716.73 1261.54,1717.07 1407.78,1716.58 1554.93,1717.28 1879.91,1716.76 4494,1717 4861,1717 1848.5,1717.74 2171.97,1718.27 6228.88,1717.66 2142.55,1718.82 4348,1719 5374.12,1725.33 3025.56,1731.15 5543.26,1731.02 2503.77,1732.8 5580.62,1732.53 5628.62,1732.53 5676.62,1732.53 5724.62,1732.53 5772.62,1732.53 5820.62,1732.53 5868.62,1732.53 5916.62,1732.53 5964.62,1732.53 6011.62,1732.53 6059.62,1732.53 6107.62,1732.53 6155.62,1732.53 2427.67,1738.89 2012.78,1741.13 1719.17,1742.45 2301.53,1741.78 839.24,1743.44 1132.5,1743.31 1425.79,1743.03 692.58,1743.64 985.78,1743.73 1278.94,1743.92 1572.06,1744.31 1865.06,1745.11 2157.79,1746.96 5516.44,1748.47 6228.34,1749.65 3100.26,1752.4 4126,1752 4569,1752 5299,1752 3613,1754 3832,1756 4272,1756 4421,1756 4934,1756 5374.12,1757.33 3247,1758 3323,1758 3542,1758 3686,1758 3759,1758 3907,1758 4713,1758 5005,1758 5078,1758 3469,1761 3980,1761 4055,1761 4199,1761 4640,1761 4788,1761 3173.57,1762.19 3025.56,1763.15 3394,1763 5153,1763 5224,1763 2503.77,1764.8 4494,1765 4861,1765 4348,1767 2427.67,1770.89 2305.06,1773.59 5496.77,1773.71 689.55,1775.5 6214.38,1778.45 5374.12,1789.33 764,1790 3025.56,1795.15 2082.31,1797 2503.77,1796.8 911.31,1798 1792.31,1798 6189.86,1799 3100.26,1800.4 4126,1800 4569,1800 5299,1800 3613,1802 1938.31,1803 2427.67,1802.89 3832,1804 4272,1804 4421,1804 4934,1804 5489.5,1804.87 1057.31,1806 2305.06,1805.59 3247,1806 3323,1806 3542,1806 3686,1806 3759,1806 3907,1806 4713,1806 5005,1806 5078,1806 5565,1806 5613,1806 5661,1806 5709,1806 5757,1806 5805,1806 5856.95,1805.95 689.55,1807.5 1204.31,1807 1426.31,1807 1499.31,1807 1570.31,1807 1640.31,1807 1719.31,1807 2011.31,1807 5934.93,1807.24 5966.93,1807.24 5998.93,1807.24 6030.93,1807.24 6062.93,1807.24 6094.93,1807.24 6126.93,1807.24 6158.93,1807.21 3469,1809 3980,1809 4055,1809 4199,1809 4640,1809 4788,1809 838.31,1810 3173.57,1810.19 3394,1811 5153,1811 5224,1811 2231.76,1811.78 1130.31,1813 1350.31,1813 1864.31,1813 2158.31,1813 4494,1813 4861,1813 5903.62,1813.85 4348,1815 984.31,1819 1277.31,1819 5374.12,1821.33 3025.56,1827.15 2503.77,1828.8 2427.67,1834.89 5927.55,1835.1 5496.04,1836.2 764,1838 2305.06,1837.59 689.55,1839.5 2082.31,1845 911.31,1846 1792.31,1846 3100.26,1848.4 4126,1848 4569,1848 5299,1848 3613,1850 1938.31,1851 3832,1852 4272,1852 4421,1852 4934,1852 5374.12,1853.33 1057.31,1854 3247,1854 3323,1854 3542,1854 3686,1854 3759,1854 3907,1854 4713,1854 5005,1854 5078,1854 1204.31,1855 1426.31,1855 1499.31,1855 1570.31,1855 1640.31,1855 1719.31,1855 2011.31,1855 3469,1857 3980,1857 4055,1857 4199,1857 4640,1857 4788,1857 838.31,1858 3173.57,1858.19 3025.56,1859.15 3394,1859 5153,1859 5224,1859 2231.76,1859.78 1130.31,1861 1350.31,1861 1864.31,1861 2158.31,1861 2503.77,1860.8 4494,1861 4861,1861 5514.92,1862.04 4348,1863 5940.61,1864.31 984.31,1867 1277.31,1867 2427.67,1866.89 2305.06,1869.59 689.55,1871.5 5542.96,1877.46 5574.81,1880.54 5606.81,1880.54 5638.81,1880.54 5670.81,1880.54 5702.81,1880.54 5734.81,1880.54 5766.81,1880.54 5798.81,1880.54 5830.81,1880.54 5862.81,1880.54 5374.12,1885.33 764,1886 3025.56,1891.15 2082.31,1893 2503.77,1892.8 911.31,1894 1792.31,1894 3100.26,1896.4 4126,1896 4569,1896 5299,1896 5942.05,1896.28 3613,1898 1938.31,1899 2427.67,1898.89 3832,1900 4272,1900 4421,1900 4934,1900 1057.31,1902 2305.06,1901.59 3247,1902 3323,1902 3542,1902 3686,1902 3759,1902 3907,1902 4713,1902 5005,1902 5078,1902 689.55,1903.5 1204.31,1903 1426.31,1903 1499.31,1903 1570.31,1903 1640.31,1903 1719.31,1903 2011.31,1903 3469,1905 3980,1905 4055,1905 4199,1905 4640,1905 4788,1905 838.31,1906 3173.57,1906.19 3394,1907 5153,1907 5224,1907 2231.76,1907.78 1130.31,1909 1350.31,1909 1864.31,1909 2158.31,1909 4494,1909 4861,1909 4348,1911 5865.95,1912.39 984.31,1915 1277.31,1915 5374.12,1917.33 3025.56,1923.15 2503.77,1924.8 5942.05,1928.28 2427.67,1930.89 764,1934 2305.06,1933.59 689.55,1935.5 2082.31,1941 911.31,1942 1792.31,1942 3100.26,1944.4 4126,1944 4569,1944 5299,1944 5865.95,1944.39 3613,1946 1938.31,1947 3832,1948 4272,1948 4421,1948 4934,1948 5374.12,1949.33 1057.31,1950 3247,1950 3323,1950 3542,1950 3686,1950 3759,1950 3907,1950 4713,1950 5005,1950 5078,1950 1204.31,1951 1426.31,1951 1499.31,1951 1570.31,1951 1640.31,1951 1719.31,1951 2011.31,1951 3469,1953 3980,1953 4055,1953 4199,1953 4640,1953 4788,1953 838.31,1954 3173.57,1954.19 3025.56,1955.15 3394,1955 5153,1955 5224,1955 2231.76,1955.78 1130.31,1957 1350.31,1957 1864.31,1957 2158.31,1957 2501.74,1956.73 4494,1957 4861,1957 4348,1959 2413.61,1959.64 5942.05,1960.28 475.98,1962.74 507.98,1962.95 539.98,1962.95 571.98,1962.95 603.98,1962.95 984.31,1963 1277.31,1963 2317.78,1962.95 2349.78,1962.95 2381.78,1962.95 635.9,1965.23 689.55,1967.5 444.43,1968.07 5865.95,1976.39 664.49,1979.6 5374.12,1981.33 415.86,1982.48 764,1982 2490.55,1986.71 3025.56,1987.15 2082.31,1989 911.31,1990 1792.31,1990 3100.26,1992.4 4126,1992 4569,1992 5299,1992 5942.05,1992.28 3613,1994 1938.31,1995 3832,1996 4272,1996 4421,1996 4934,1996 1057.31,1998 3247,1998 3323,1998 3542,1998 3686,1998 3759,1998 3907,1998 4713,1998 5005,1998 5078,1998 689.55,1999.5 1204.31,1999 1426.31,1999 1499.31,1999 1570.31,1999 1640.31,1999 1719.31,1999 2011.31,1999 3469,2001 3980,2001 4055,2001 4199,2001 4640,2001 4788,2001 838.31,2002 3173.57,2002.19 2231.75,2002.62 3394,2003 5153,2003 5224,2003 393.25,2005.12 1130.31,2005 1350.31,2005 1864.31,2005 2158.31,2005 4494,2005 4861,2005 4348,2007 5865.95,2008.39 984.31,2011 1277.31,2011 2470.83,2011.92 5374.12,2013.33 3025.56,2019.15 2256.87,2022.44 5942.05,2024.28 764,2030 2444.22,2029.69 378.91,2033.73 2231.75,2034.62 2082.31,2037 2285.48,2036.79 911.31,2038 1792.31,2038 2413.39,2038.24 480.2,2039.05 512.2,2039.05 544.2,2039.05 576.2,2039.05 608.2,2039.05 2317.4,2039.05 2349.4,2039.05 2381.4,2039.05 3100.26,2040.4 4126,2040 4569,2040 5299,2040 5864.35,2040.35 3613,2042 1938.31,2043 3832,2044 4272,2044 4421,2044 4934,2044 5374.12,2045.33 1057.31,2046 3247,2046 3323,2046 3542,2046 3686,2046 3759,2046 3907,2046 4713,2046 5005,2046 5078,2046 1204.31,2047 1426.31,2047 1499.31,2047 1570.31,2047 1640.31,2047 1719.31,2047 2011.31,2047 3469,2049 3980,2049 4055,2049 4199,2049 4640,2049 4788,2049 838.31,2050 3173.57,2050.19 3025.56,2051.15 3394,2051 5153,2051 5224,2051 1130.31,2053 1350.31,2053 1864.31,2053 2158.31,2053 4494,2053 4861,2053 452.42,2054.93 4348,2055 5939.32,2056.16 984.31,2059 1277.31,2059 5843.04,2064.22 373.67,2065.3 692.26,2065.57 2231.75,2066.62 2852.33,2067.18 2884.32,2066.95 2916.32,2066.95 2948.32,2066.95 5459.16,2066.95 5491.16,2066.95 5523.16,2066.95 5555.16,2066.95 5587.16,2066.95 5619.16,2066.95 5651.16,2066.95 5683.16,2066.95 5715.16,2066.95 5747.16,2066.95 5779.16,2066.95 5811.16,2066.95 5427.25,2069.37 616.25,2070.02 2820.75,2072.4 2979.95,2071.83 5374.12,2077.33 764,2078 3025.56,2083.15 5398.75,2083.93 2082.31,2085 2791.36,2085.04 911.31,2086 1792.31,2086 5927.55,2085.92 449.95,2086.84 3100.26,2088.4 4126,2088 4569,2088 5299,2088 3613,2090 1938.31,2091 3832,2092 4272,2092 4421,2092 4934,2092 1057.31,2094 3247,2094 3323,2094 3542,2094 3686,2094 3759,2094 3907,2094 4713,2094 5005,2094 5078,2094 1204.31,2095 1426.31,2095 1499.31,2095 1570.31,2095 1640.31,2095 1719.31,2095 2011.31,2095 373.85,2097.3 3469,2097 3980,2097 4055,2097 4199,2097 4640,2097 4788,2097 838.31,2098 3173.57,2098.19 2231.75,2098.62 3394,2099 5153,2099 5224,2099 1130.31,2101 1350.31,2101 1864.31,2101 2158.31,2101 4494,2101 4861,2101 214.24,2102.26 246.24,2102.26 278.24,2102.26 310.24,2102.26 342.24,2102.26 616.25,2102.02 4348,2103 2765.6,2104.03 182.51,2106.37 984.31,2107 1277.31,2107 5378.84,2108.98 5908.17,2111.38 692.26,2113.57 3025.56,2115.15 448.47,2118.81 155.22,2123.09 764,2126 2745.15,2128.65 5882.16,2130.02 2231.75,2130.62 2082.31,2133 616.25,2134.02 911.31,2134 1792.31,2134 3100.26,2136.4 4126,2136 4569,2136 5299,2136 3613,2138 1938.31,2139 3832,2140 4272,2140 4421,2140 4934,2140 5852.06,2140.87 1057.31,2142 3247,2142 3323,2142 3542,2142 3686,2142 3759,2142 3907,2142 4713,2142 5005,2142 5078,2142 1204.31,2143 1426.31,2143 1499.31,2143 1570.31,2143 1640.31,2143 1719.31,2143 2011.31,2143 2874.25,2143.05 2906.25,2143.05 2938.25,2143.05 5468.13,2143.05 5500.13,2143.05 5532.13,2143.05 5564.13,2143.05 5596.13,2143.05 5628.13,2143.05 5660.13,2143.05 5692.13,2143.05 5724.13,2143.05 5756.13,2143.05 5788.13,2143.05 5820.13,2143.05 3469,2145 3980,2145 4055,2145 4199,2145 4640,2145 4788,2145 838.31,2146 2842.37,2145.78 3173.57,2146.19 3394,2147 5153,2147 5224,2147 5373,2147 435.26,2147.95 3028.25,2147.8 1130.31,2149 1350.31,2149 1864.31,2149 2158.31,2149 4494,2149 4861,2149 137.52,2149.75 4348,2151 984.31,2155 1277.31,2155 2730.83,2157.26 692.26,2161.57 2231.75,2162.62 2815.12,2162.56 616.25,2166.02 5447.42,2167.45 2952.26,2171.82 764,2174 219,2175.31 267,2175.31 315,2175.31 363,2175.31 419.08,2175.56 451.08,2175.56 483.08,2175.56 514.95,2178.47 132.33,2181.33 2082.31,2181 911.31,2182 1792.31,2182 3100.26,2184.4 4126,2184 4569,2184 5299,2184 3613,2186 1938.31,2187 2723.8,2188.48 3832,2188 4272,2188 4421,2188 4934,2188 1057.31,2190 3247,2190 3323,2190 3542,2190 3686,2190 3759,2190 3907,2190 4713,2190 5005,2190 5078,2190 1204.31,2191 1426.31,2191 1499.31,2191 1570.31,2191 1640.31,2191 1719.31,2191 2011.31,2191 2800.39,2190.97 3469,2193 3980,2193 4055,2193 4199,2193 4640,2193 4788,2193 543.1,2193.69 838.31,2194 3173.57,2194.19 2231.75,2194.62 3394,2195 5153,2195 5224,2195 5373,2195 3028.25,2195.8 1130.31,2197 1350.31,2197 1864.31,2197 2158.31,2197 4494,2197 4861,2197 616.25,2198.02 4348,2199 5447.42,2199.45 984.31,2203 1277.31,2203 2952.26,2203.82 692.26,2209.57 141.04,2212.12 562.24,2219.34 2722.95,2220.47 764,2222 2799.05,2222.94 2231.75,2226.62 2082.31,2229 616.25,2230.02 911.31,2230 1792.31,2230 2500.79,2231.17 2532.79,2231.17 2564.79,2231.17 2596.79,2231.17 2628.79,2231.17 2660.79,2231.17 2692.79,2231.17 5447.42,2231.45 3100.26,2232.4 4126,2232 4569,2232 5299,2232 2468.85,2233.15 3613,2234 1938.31,2235 161.91,2236.38 2952.26,2235.82 3832,2236 4272,2236 4421,2236 4934,2236 1057.31,2238 3247,2238 3323,2238 3542,2238 3686,2238 3759,2238 3907,2238 4713,2238 5005,2238 5078,2238 1204.31,2239 1426.31,2239 1499.31,2239 1570.31,2239 1640.31,2239 1719.31,2239 2011.31,2239 3469,2241 3980,2241 4055,2241 4199,2241 4640,2241 4788,2241 838.31,2242 3173.57,2242.19 3394,2243 5153,2243 5224,2243 5373,2243 3028.25,2243.8 1130.31,2245 1350.31,2245 1864.31,2245 2158.31,2245 4494,2245 4861,2245 239,2246.31 287,2246.31 335,2246.31 383,2246.31 431,2246.31 479,2246.31 2440.06,2247.11 4348,2247 190.88,2249.96 569.01,2250.61 984.31,2251 1277.31,2251 2795.71,2254.76 692.26,2257.57 2231.75,2258.62 616.25,2262.02 5447.42,2263.45 162.12,2263.99 2952.26,2267.82 764,2270 2419.51,2271.65 2082.31,2277 911.31,2278 1792.31,2278 3100.26,2280.4 4126,2280 4569,2280 5299,2280 561.98,2281.83 3613,2282 1938.31,2283 2779.93,2282.6 3832,2284 4272,2284 4421,2284 4934,2284 1057.31,2286 3247,2286 3323,2286 3542,2286 3686,2286 3759,2286 3907,2286 4713,2286 5005,2286 5078,2286 1204.31,2287 1426.31,2287 1499.31,2287 1570.31,2287 1640.31,2287 1719.31,2287 2011.31,2287 141.17,2288.18 3469,2289 3980,2289 4055,2289 4199,2289 4640,2289 4788,2289 838.31,2290 3173.57,2290.19 2231.75,2290.62 3394,2291 5153,2291 5224,2291 5373,2291 3028.25,2291.8 1130.31,2293 1350.31,2293 1864.31,2293 2158.31,2293 4494,2293 4861,2293 616.25,2294.02 4348,2295 5447.42,2295.45 984.31,2299 1277.31,2299 2952.26,2299.82 2411.31,2302.58 2756.57,2304.47 2788.57,2304.47 2820.57,2304.47 2852.57,2304.47 692.26,2305.57 2485.99,2305.87 2533.99,2305.87 2581.99,2305.87 2629.99,2305.87 2677.99,2305.87 2725.99,2305.87 542.55,2307.26 2884.16,2309.57 764,2318 132.36,2318.94 219,2322.31 267,2322.31 315,2322.31 363,2322.31 411,2322.31 459,2322.31 2231.75,2322.62 516.21,2325.42 2082.31,2325 616.25,2326.02 911.31,2326 1792.31,2326 2910.92,2327.13 5447.42,2327.45 3100.26,2328.4 4126,2328 4569,2328 5299,2328 3613,2330 1938.31,2331 2952.26,2331.82 3832,2332 4272,2332 4421,2332 4934,2332 1057.31,2334 2416.95,2334.07 3247,2334 3323,2334 3542,2334 3686,2334 3759,2334 3907,2334 4713,2334 5005,2334 5078,2334 1204.31,2335 1426.31,2335 1499.31,2335 1570.31,2335 1640.31,2335 1719.31,2335 2011.31,2335 3469,2337 3980,2337 4055,2337 4199,2337 4640,2337 4788,2337 838.31,2338 3173.57,2338.19 4346.45,2338.19 3394,2339 5153,2339 5224,2339 5373,2339 3028.25,2339.8 544.12,2341.08 1130.31,2341 1350.31,2341 1864.31,2341 2158.31,2341 4494,2341 4861,2341 984.31,2347 1277.31,2347 137.42,2350.54 3100.18,2353.34 692.26,2353.57 2927.78,2354.32 2231.75,2354.62 616.25,2358.02 3685.36,2358.15 3978.42,2358.75 4271.56,2359.04 4564.75,2359.18 4711.3,2359.41 5004.53,2359.36 5151.16,2359.29 5297.76,2359.34 5444.37,2359.3 2435,2360.5 3831.44,2360.15 4124.77,2359.71 4418.05,2359.5 3537.97,2361.08 2956.73,2363.51 3243.77,2363.57 764,2366 562.72,2367.11 2082.31,2373 911.31,2374 1792.31,2374 155.04,2377.25 2462.5,2376.86 1938.31,2379 2521.36,2379.18 2569.36,2379.18 2617.36,2379.18 2665.36,2379.18 2713.36,2379.18 2761.36,2379.18 2809.36,2379.18 2857.36,2379.18 1057.31,2382 3086.97,2382.48 3113.52,2382.43 1204.31,2383 1426.31,2383 1499.31,2383 1570.31,2383 1640.31,2383 1719.31,2383 2011.31,2383 3377.97,2385.38 3408.42,2384.62 3702.21,2385.36 838.31,2386 2931.66,2386.09 3670.38,2386.43 3849.66,2386.45 3995.68,2385.7 4142.7,2386.22 4289.03,2385.86 4435.83,2386.11 4582.31,2385.94 4729.01,2386.06 4875.56,2385.97 5022.21,2386.03 5168.79,2385.99 5315.42,2386.02 2231.75,2386.62